# Altium PCB BikeTheftTracker.PcbDoc
Units mil, origin at the board's own origin, x right, y up, seen from the top; angles counter-clockwise.
Board outline 6000 x 4000 mil, 2 copper layers (Top Layer, Bottom Layer); 31 components, 38 nets, 150 pads, 0 vias.
Unrouted connection lines stored in the file: 86.
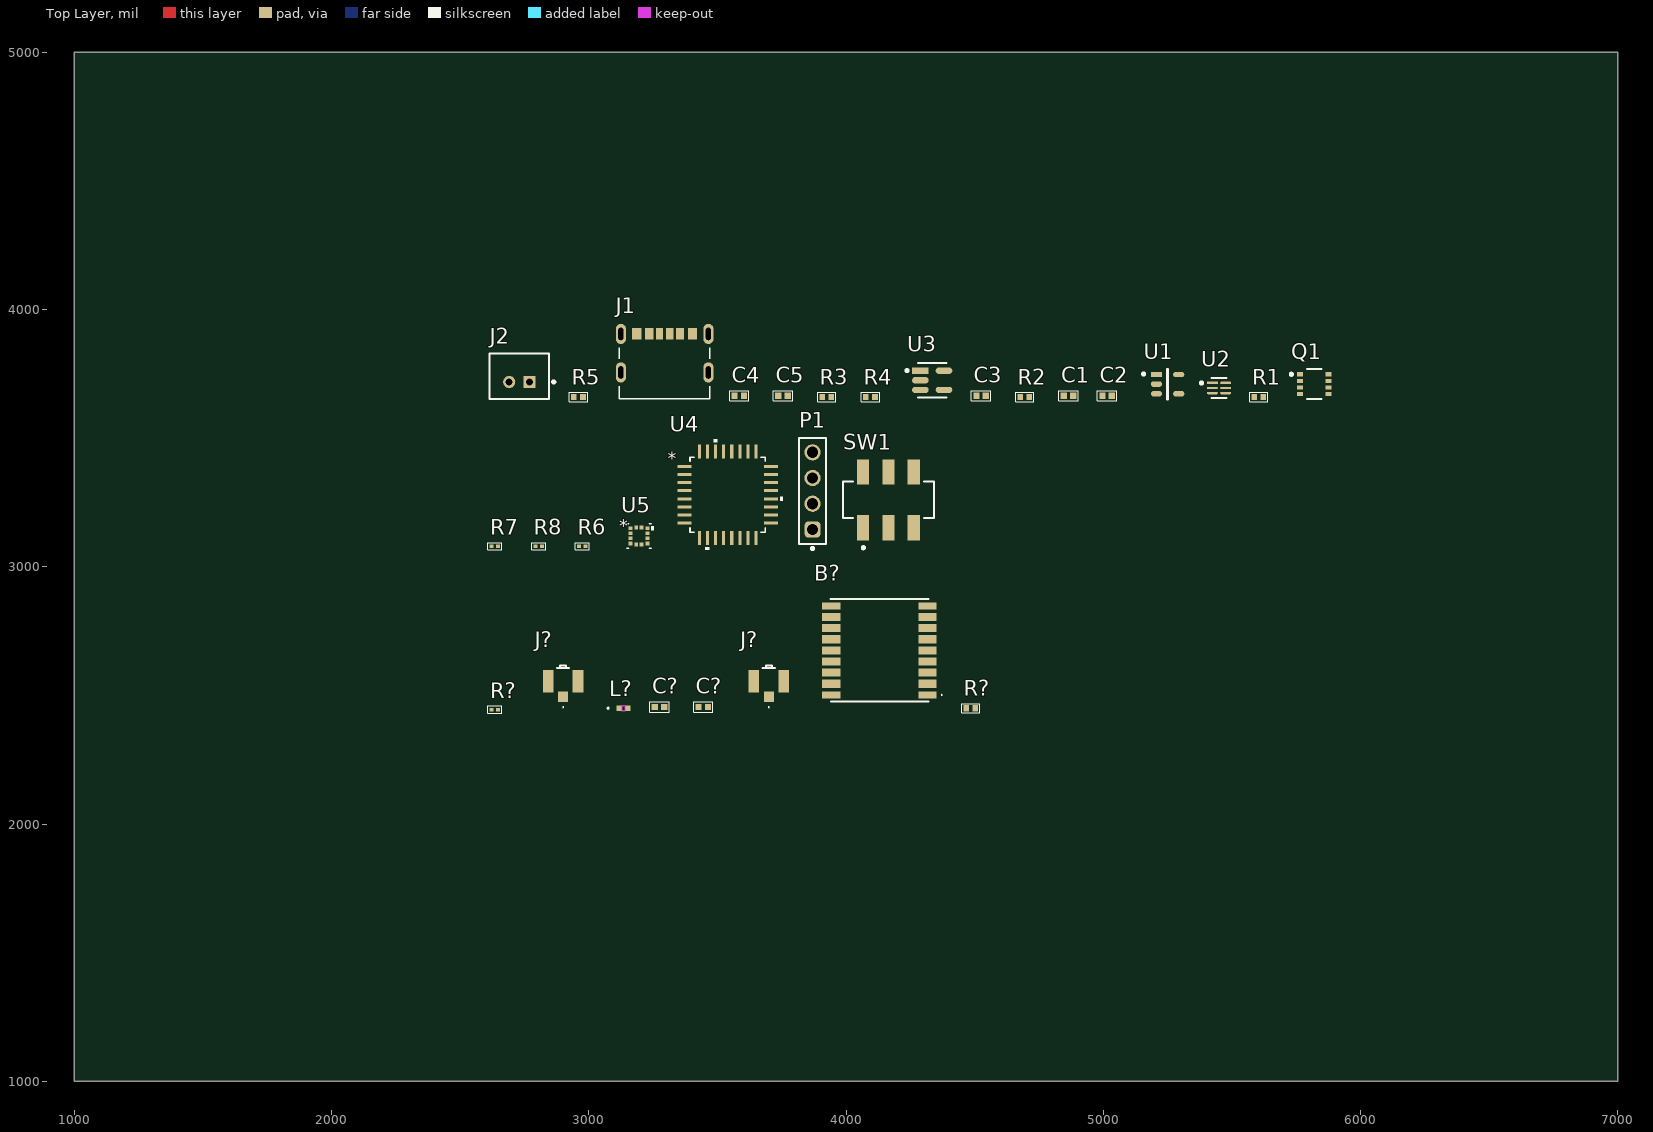
[diagram p0: Top Layer view]
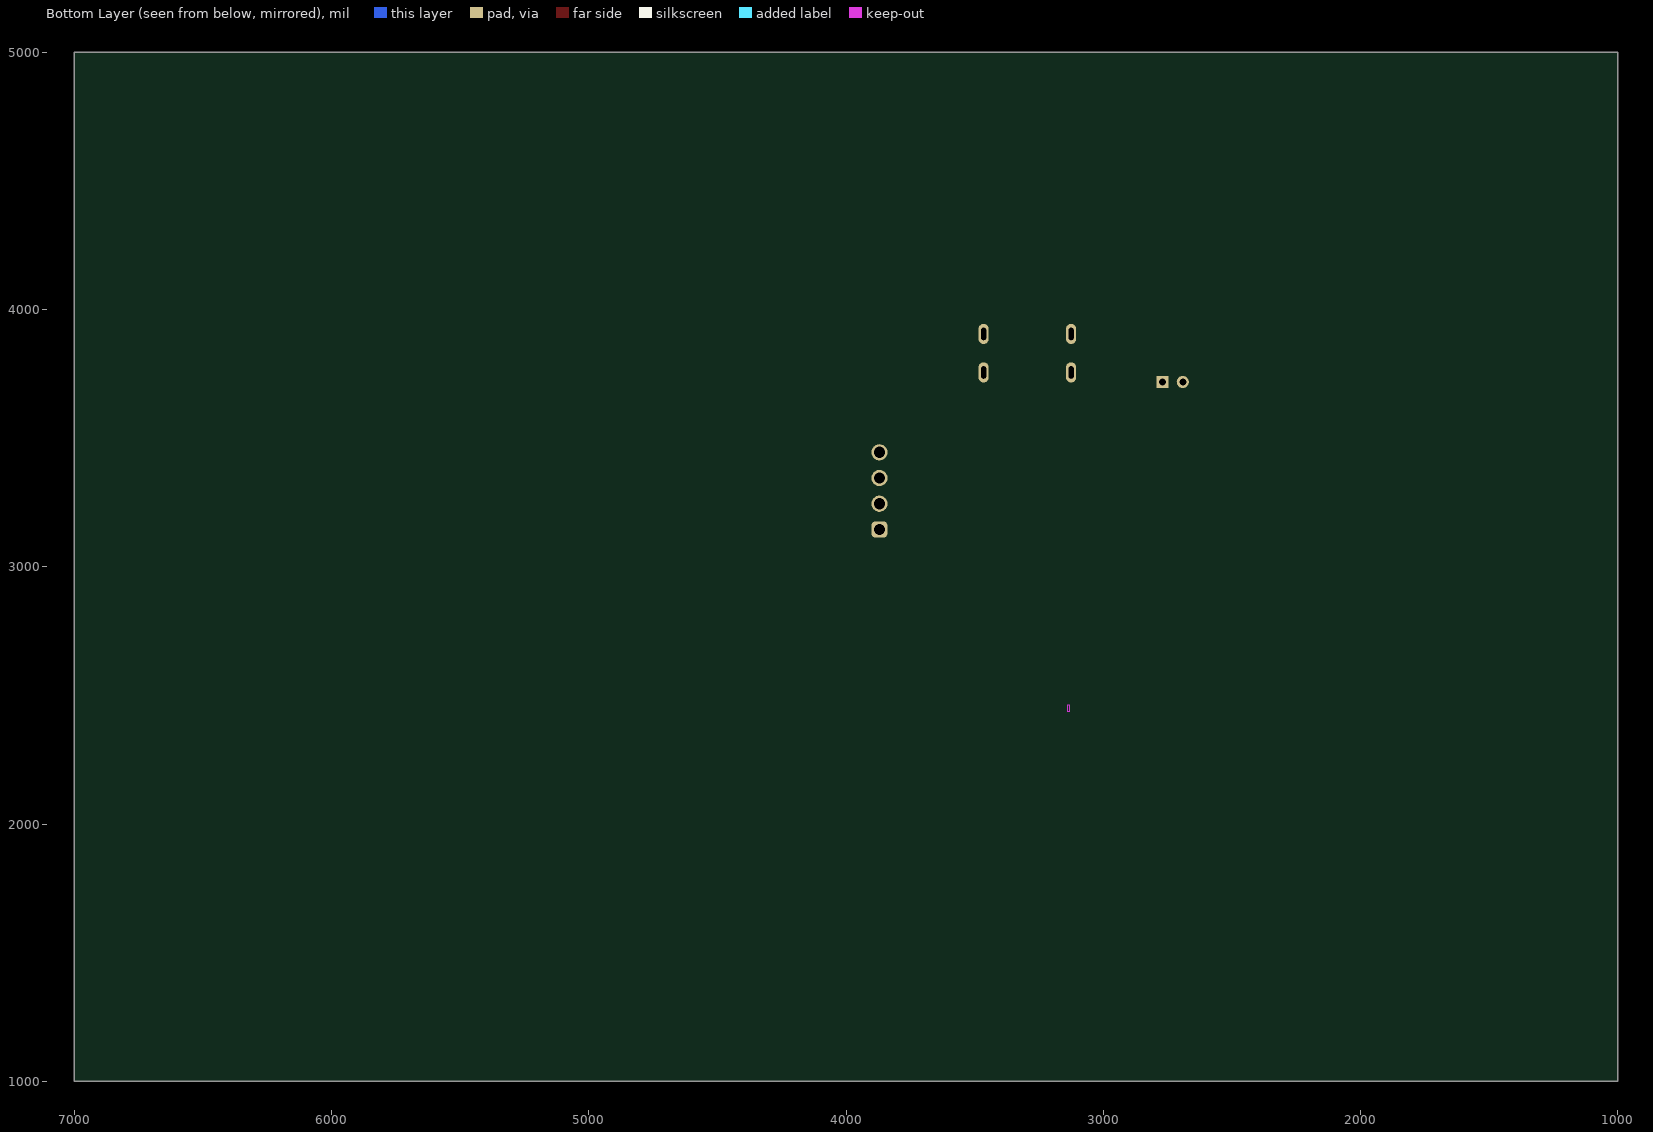
[diagram p1: Bottom Layer view, seen from below]

## Layer stack, top to bottom
Top Solder: solder mask 0.4, Solder Resist, Dk 3.5
Top Layer: signal copper 1.4
Dielectric 1: dielectric 12.6, FR-4, Dk 4.8
Bottom Layer: signal copper 1.4
Bottom Solder: solder mask 0.4, Solder Resist, Dk 3.5

## Board outline
1000,1000 7000,1000 7000,5000 1000,5000

## Design rules (kind name [scope] priority, off if disabled: settings)
Clearance [All] p1: gap=10 ignorepadtopadclearanceinfootprint=FALSE
PolygonConnect [All] p1: connectstyle=Relief reliefconductorwidth=10 reliefentries=4 polygonreliefangle="90 Angle" airgapwidth=10
RoutingVias [All] p1: holewidth=28 width=50 viastyle="Through Hole" minholewidth=28 minwidth=50 maxholewidth=28 maxwidth=50
SolderMaskExpansion [All] p1: expansion=0 istentingtop=FALSE
SupplyNets "Schematic Supply Nets" [InNet('GND')] p1: voltage=0.000
Width [All] p1: maxlimit=10 minlimit=10 preferedwidth=10
30 further rules are at their usual default settings.

## Classes and differential pairs
net class RF: RF_GPS RF_LORAWAN
component class "Power Subsystem": C1 C2 C3 C4 C5 J1 J2 Q1 R1 R2 R3 R4 R5 U1 U2 U3
component class MCU: P1 R6 R7 R8 SW1 U4 U5
component class GPS_LoraWAN: B? C? J? L? R? U?*

## Components (designator, comment, footprint, x,y, rotation, side; value= is the part's Value field where it differs from the comment)
B? "MAX-M10M-00B" MAXM10M00B 4130,2675 r0 top
C1 "1 uF" CAP_0402 4865,3665 r0 top
C2 "1 uF" CAP_0402 5015,3665 r0 top
C3 "0.1 uF" CAP_0402 4525,3665 r0 top
C4 "4.7 uF" CAP_0402 3585,3665 r0 top
C5 "4.7 uF" CAP_0402 3755,3665 r0 top
C? "100 nF" CAP_0402 3445,2455 r0 top
C? "1 uF" CAP_0402 3275,2455 r0 top
J1 "UJC-HP-3-SMT-TR" CUI_UJC-HP-3-SMT-TR 3295,3905 r0 top
J2 "B2B-PH-K(LF)(SN)" FP-B2B-PH-K_LF_SN-MFG 2730,3740 r0 top
J? "U.FL-R-SMT_10_" UFLRSMT10 2900,2555 r0 top
J? "U.FL-R-SMT_10_" UFLRSMT10 3700,2555 r0 top
L? "27 nH" IND_LQG15HN_02_MUR-L 3135,2450 r0 top
P1 "61300411121" 61300411121 3870,3295 r90 top
Q1 "ECH8695R-TL-W" FP-318BF-MFG 5820,3710 r0 top
R1 "330 Ω" RES_0402 5605,3660 r0 top
R2 "2.2 kΩ" RES_0402 4695,3660 r0 top
R3 "5.1 kΩ" RES_0402 3925,3660 r0 top
R4 "5.1 kΩ" RES_0402 4095,3660 r0 top
R5 "2 kΩ" RES_0402 2960,3660 r0 top
R6 "10 kΩ" RES_0201 2975,3080 r0 top
R7 "10 kΩ" RES_0201 2635,3080 r0 top
R8 "10 kΩ" RES_0201 2805,3080 r0 top
R? "10 kΩ" RES_0201 2635,2445 r0 top
R? "10 kΩ" RES_0402 4485,2450 r0 top
SW1 "JS202011SCQN" FP-JS202011SCQN-MFG 4165,3260 r0 top
U1 "AP2112K-3.3TRG1" FP-SOT25-IPC_C 5250,3710 r0 top
U2 "BQ29701DSER" FP-DSE0006A-IPC_A 5450,3695 r0 top
U3 "MCP73831T-2ACI/OT" FP-C04-091-OT-IPC_A 4335,3725 r0 top
U4 "STM32L011K4T6" LQFP32_7X7X1P4 3540,3280 r0 top
U5 "LIS2DW12TR" LGA-12_2X2X0P7_STM 3195,3120 r0 top

## Footprints (in the part's own frame and the unit in brackets; to place one, negate y for a bottom-side part, rotate by r counter-clockwise, add the part's x,y. Pads: shape width x height; smd on the part's side, far side on the other; paste and mask are expansions set on the pad)
61300411121 [mm] "Pin Header, pitch 2.54 mm, THT, Vertical, single row, 4p"
  rrect50% 1.6x1.6 hole 1.1: 1(-3.81,0)
  round 1.6 hole 1.1: 2(-1.27,0) 3(1.27,0) 4(3.81,0)
  silkscreen extent -5.8,-1.35 5.23,1.35, body extent -5.08,-1.27 5.08,1.27, height 8.57
CAP_0402 [mm]
  rect 0.62x0.62 smd mask+0.05: 1(-0.46,0) 2(0.46,0)
  silkscreen extent -0.95,-0.5 0.95,0.5, body extent -0.53,-0.28 0.53,0.28, height 0.55
CUI_UJC-HP-3-SMT-TR [mm]
  rect 0.7x1.15 smd: A5(-0.5,0.005) B5(0.5,0.005)
  rect 0.8x1.15 smd: A9(1.52,0.005) B9(-1.52,0.005)
  rect 0.9x1.15 smd: A12(2.75,0.005) B12(-2.75,0.005)
  oval 1x2 hole 0.5 slot 1.2 at 90 deg: S1(-4.32,0) S2(4.32,0) S3(-4.32,-3.8) S4(4.32,-3.8)
  silkscreen extent -4.47,-6.4 4.47,-1.35, body extent -4.47,-6.44 4.47,0.46, height 3.3
FP-318BF-MFG [mm]
  rect 0.6x0.4 smd paste+0 mask+0: 1(-1.4,0.975) 2(-1.4,0.325) 3(-1.4,-0.325) 4(-1.4,-0.975) 5(1.4,-0.975) 6(1.4,-0.325) 7(1.4,0.325) 8(1.4,0.975)
  silkscreen extent -2.38,-1.48 0.72,1.48, body extent -1.8,-1.58 1.8,1.58, height 0.25
FP-B2B-PH-K_LF_SN-MFG [mm]
  rect 1.2x1.2 hole 0.7 paste-2539.97 mask+0: 1(1,-0.55)
  round 1.2 hole 0.7 paste-2539.97 mask+0: 2(-1,-0.55)
  silkscreen extent -2.95,-2.25 3.53,2.25, body extent -3.05,-2.35 3.05,2.35, height 0.25
FP-C04-091-OT-IPC_A [mil]
  rect 64.5x24.33 smd paste+0 mask+0: 1(-45.91,37.4)
  rrect100% 64.5x24.33 smd paste+0 mask+0: 2(-45.91,0) 3(-45.91,-37.4) 4(45.91,-37.4) 5(45.91,37.4)
  silkscreen extent -103,-67 55,67
FP-DSE0006A-IPC_A [mm]
  rect 1.065x0.242 smd paste+0 mask+0: 1(-0.654,0.5)
  rrect100% 1.065x0.242 smd paste+0 mask+0: 2(-0.654,0) 3(-0.654,-0.5) 4(0.654,-0.5) 5(0.654,0) 6(0.654,0.5)
  silkscreen extent -1.86,-1 0.75,1, body extent -1.69,-1.25 1.69,1.25, height 0.25
FP-JS202011SCQN-MFG [mm]
  rect 1.2x2.5 smd paste+0 mask+0: 1(-2.5,-2.75) 2(0,-2.75) 3(2.5,-2.75) 4(-2.5,2.75) 5(0,2.75) 6(2.5,2.75)
  silkscreen extent -4.5,-4.85 4.5,1.8, body extent -4.6,-4.1 4.6,4.1, height 0.25
FP-SOT25-IPC_C [mm]
  rect 1.107x0.536 smd paste+0 mask+0: 1(-1.101,0.95)
  rrect100% 1.107x0.536 smd paste+0 mask+0: 2(-1.101,0) 3(-1.101,-0.95) 4(1.101,-0.95) 5(1.101,0.95)
  silkscreen extent -2.48,-1.5 0.05,1.5, body extent -1.75,-1.6 1.75,1.6, height 0.25
IND_LQG15HN_02_MUR-L [mil]
  rect 20x20 smd paste+0 mask+0: 1(-16.5,0) 2(16.5,0)
  Top Layer keep-out region: -4.5,-9 -4.5,9 4.5,9 4.5,-9
  Keep-Out Layer region: -4.5,-11 -4.5,11 4.5,11 4.5,-11
  silkscreen extent -62,-3 -56,3, body extent -21,-11 21,11, height 20
LGA-12_2X2X0P7_STM [mil]
  rect 15x14 smd paste+0 mask+4: 1(-33,29.53) 2(-33,9.84) 3(-33,-9.84) 4(-33,-29.53) 7(33,-29.53) 8(33,-9.84) 9(33,9.84) 10(33,29.53)
  rect 14x15 smd paste+0 mask+4: 5(-9.84,-33) 6(9.84,-33) 11(9.84,33) 12(-9.84,33)
  silkscreen extent -48,-48 58,48, body extent -43,-43 43,43, height 28
LQFP32_7X7X1P4 [mm]
  rect 1.353x0.304 smd paste+0 mask+0: 1(-4.271,2.8) 2(-4.271,2) 3(-4.271,1.2) 4(-4.271,0.4) 5(-4.271,-0.4) 6(-4.271,-1.2) 7(-4.271,-2) 8(-4.271,-2.8) 17(4.271,-2.8) 18(4.271,-2) 19(4.271,-1.2) 20(4.271,-0.4) 21(4.271,0.4) 22(4.271,1.2) 23(4.271,2) 24(4.271,2.8)
  rect 0.304x1.353 smd paste+0 mask+0: 9(-2.8,-4.271) 10(-2,-4.271) 11(-1.2,-4.271) 12(-0.4,-4.271) 13(0.4,-4.271) 14(1.2,-4.271) 15(2,-4.271) 16(2.8,-4.271) 25(2.8,4.271) 26(2,4.271) 27(1.2,4.271) 28(0.4,4.271) 29(-0.4,4.271) 30(-1.2,4.271) 31(-2,4.271) 32(-2.8,4.271)
  silkscreen extent -3.72,-5.46 5.46,5.46, body extent -4.6,-4.6 4.6,4.6, height 1.6
MAXM10M00B [mm]
  rect 1.8x0.7 smd: 1(4.75,-4.4) 9(4.75,4.4) 10(-4.75,4.4) 18(-4.75,-4.4)
  rect 1.8x0.8 smd: 2(4.75,-3.3) 3(4.75,-2.2) 4(4.75,-1.1) 5(4.75,0) 6(4.75,1.1) 7(4.75,2.2) 8(4.75,3.3) 11(-4.75,3.3) 12(-4.75,2.2) 13(-4.75,1.1) 14(-4.75,0) 15(-4.75,-1.1) 16(-4.75,-2.2) 17(-4.75,-3.3)
  silkscreen extent -4.85,-5.05 6.2,5.05, body extent -4.85,-5.05 4.85,5.05, height 2.5
RES_0201 [mm]
  rect 0.4x0.35 smd mask+0.05: 1(-0.325,0) 2(0.325,0)
  silkscreen extent -0.7,-0.35 0.7,0.35, body extent -0.32,-0.17 0.32,0.17, height 0.26
RES_0402 [mm]
  rect 0.55x0.6 smd mask+0.05: 1(-0.45,0) 2(0.45,0)
  silkscreen extent -0.9,-0.45 0.9,0.45, body extent -0.53,-0.28 0.53,0.28, height 0.4
UFLRSMT10 [mm]
  rect 1x1.05 smd: 1(0,-1.525)
  rect 1.05x2.2 smd: 2(-1.475,0) 3(1.475,0)
  silkscreen extent -0.6,-2.6 0.6,1.55, body extent -1.5,-1.55 1.5,1.55, height 1.25

## Part data
B?: "GPS Modules u-blox M10 GNSS LCC module, firmware in ROM, crystal oscillator", Manufacturer_Name=u-blox, Mouser Part Number=377-MAX-M10M-00B, Arrow Part Number=MAX-M10M-00B, Arrow Price/Stock=https://www.arrow.com/en/products/max-m10m-00b/u-blox?utm_currency=USD&region=nac, Datasheet Link=https://content.u-blox.com/sites/default/files/documents/MAX-M10M_IntegrationManual_UBX-22038241.pdf, Geometry.Height=2.7mm, Manufacturer_Part_Number=MAX-M10M-00B, Mouser Price/Stock=https://www.mouser.co.uk/ProductDetail/u-blox/MAX-M10M-00B?qs=A6eO%252BMLsxmQGh8%2FJ1ZmexA%3D%3D
C1 C2 C3 C4 C5 C? C?: library part CAP_0402, "Capacitor SMD 0402 Generic", Capacitance="100 pF", LCSC Part Number=C106200, Manufacturer=YAGEO, Manufacturer Part Number=CC0402JRNPO9BN101, Tolerance=5%
J1: "USB Connectors USB jack, C type, power only, 6 pin, horizonal, gold flash plating, surface mount, T&R", Manufacturer 1="Same Sky", Package=None, Supplier Part Number 1=490-UJC-HP-3-SMT-TR, Availability=Unavailable, Manufacturer Part Number 1=UJC-HP-3-SMT-TR, MP=UJC-HP-3-SMT-TR, Price=None, Supplier 1=Mouser
J2: library part CMP-17439-000674-1, "Connector Header Through Hole 2 position 0.079\" (2.00mm)", Color=Beige, Current Rating=2A, Insulation Resistance=1GR, Manufacturer 1="JST Commercial", Manufacturer Part Number 1=B2B-PH-K-S(LF)(SN), Max Operating Temperature=85°C, Min Operating Temperature=-25°C, Supplier Part Number 1=306-B2BPHKSLFSNPP, Voltage Rating=100V, Contact Material=Brass, Contact Plating=Tin, Gender=Male, Lead Free="Lead Free", Material=Polyamide, Mount="Through Hole", Number of Positions=2, Number of Rows=1, Pitch=2mm, Supplier 1=Mouser, Termination=Crimp
J? J?: "U.FL (UMCC) Connector Receptacle, Male Pin 50 Ohms Surface Mount Solder", Arrow Part Number=U.FL-R-SMT(10), Manufacturer_Name=Hirose, Mouser Part Number=798-U.FL-R-SMT10, Arrow Price/Stock=https://www.arrow.com/en/products/u.fl-r-smt-10/hirose-electric?utm_currency=USD&region=nac, Datasheet Link=https://eu.mouser.com/datasheet/2/185/hiros05388_1-2269186.pdf, Geometry.Height=1.45mm, Manufacturer_Part_Number=U.FL-R-SMT(10), Mouser Price/Stock=https://www.mouser.co.uk/ProductDetail/Hirose-Connector/U.FL-R-SMT10?qs=Ux3WWAnHpjBT1CWD8UMEMQ%3D%3D
L?: library part LQG15HS15NJ02D, "Description", Manufacturer_Name=Murata, Copyright="Copyright (C) 2025 Ultra Librarian. All rights reserved.", Manufacturer_Part_Number=LQG15HS15NJ02D
P1: library part CMP-1502-01064-4, "THT Vertical Pin Header WR-PHD, Pitch 2.54 mm, Single Row, 4 pins", Color=Black, Contact Resistance=20mΩ, Current Rating=3A, Max Operating Temperature=105°C, Min Operating Temperature=-40°C, Operating Supply Voltage=250V, Connector Type="Male Pin", Contact Material=Gold, Contact Mating Length=5.9944mm, Contact Plating=Gold, Gender=Male, Height=8.89mm, Lead Free="Lead Free", Lead Pitch=2.54mm, Mount="Through Hole", Number of Contacts=4, Number of Pins=4, Number of Positions=4, Number of Rows=1, Orientation=Vertical, Packaging=Bulk, Pitch=2.54mm, RoHS=Compliant, Termination=Solder, Voltage Rating=250V
Q1: library part CMP-00278-51167104-1, "ECH8695R-TL-W Dual N-Channel Power MOSFET, 24V, 11 A, 9.1 mΩ", Case/Package=SMD/SMT, Continuous Drain Current (ID)=11A, Drain to Source Breakdown Voltage=24V, Drain to Source Resistance=7mΩ, Gate to Source Voltage (Vgs)=12.5V, Manufacturer 1=onsemi, Manufacturer Lifecycle Status=ACTIVE, Max Junction Temperature (Tj)=150°C, Max Power Dissipation=1.4W, Min Operating Temperature=-55°C, Power Dissipation=1.5W, Supplier Part Number 1=863-ECH8695R-TL-W, Contact Plating=Tin, Drain to Source Voltage (Vdss)=24V, Element Configuration=Dual, Fall Time=22.3µs, Height=950µm, Lead Free="Lead Free", Length=2.9mm, Lifecycle Status=Production, Manufacturer Part Number 1=ECH8695R-TL-W, Max Operating Temperature=150°C, Mount="Surface Mount", NexarPartId=51167104, Number of Channels=2, Number of Pins=8, Rds On Max=9.1mΩ, Rise Time=320ns, RoHS=Compliant, Schedule B="8541290080, 8541290080|8541290080, 8541290080|8541290080|8541290080, 8541290080|8541290080|8541290080|8541290080", Supplier 1=Mouser, Turn-Off Delay Time=19.7µs, Turn-On Delay Time=300ns, Width=2.3mm
R1 R2 R3 R4 R5 R?: library part RES_0402, "Resistor SMD 0402 Generic", LCSC Part Number=C93947, Manufacturer=YAGEO, Manufacturer Part Number=RC0402FR07150KL, Resistance="150 kOhm", Tolerance=1%
R6 R7 R8 R?: library part RES_0201, "Resistor SMD 0201 Generic", LCSC Part Number=C852221, Manufacturer=YAGEO, Manufacturer Part Number=RT0201BRD07200RL, Resistance="200 Ohm", Tolerance=0.1%
SW1: library part CMP-2000-05087-3, "SWITCH SLIDE DPDT 300MA 6V", Actuator Color=Black, Contact Current Rating=300mA, Contact Resistance=70mR, Flammability Rating="UL94 V-2", Max Operating Temperature=85°C, Max Voltage Rating (DC)=6V, Min Operating Temperature=-20°C, Package Quantity=1, Actuator Length=2mm, Actuator Material=Nylon, Actuator Type=Standard, Contact Material="Copper Alloy", Contact Plating=Silver, Current Rating=300mA, Depth=7.5mm, Electrical Life=5000Cycles, Housing Material=Nylon, Lead Free="Lead Free", Length=9mm, Max Current Rating=300mA, Mount="Surface Mount", Orientation=Vertical, Packaging="Tape and Reel", Radiation Hardening=No, REACH SVHC="No SVHC", Series=JS, Switch Function=On-On, Switch Travel=2mm, Termination="Gull Wing", Throw Configuration=DPDT, Voltage Rating (DC)=6V
U1: library part CMP-12756-000035-1, "IC REG LINEAR 3.3V 600MA SOT25", Case/Package=SOT-23-5, Dropout Voltage=250mV, Manufacturer 1="Diodes Incorporated", Max Input Voltage=6V, Max Operating Temperature=85°C, Max Output Current=600mA, Min Input Voltage=2.5V, Min Operating Temperature=-40°C, Output Voltage=3.3V, Package Quantity=1, Quiescent Current=55uA, Supplier Part Number 1=621-AP2112K-3.3TRG1, Accuracy=1.5%, Height=1.3mm, Lead Free="Lead Free", Length=3.1mm, Manufacturer Part Number 1=AP2112K-3.3TRG1, Mount="Surface Mount", Number of Outputs=1, Number of Pins=5, Number of Regulators=1, Output Current=600mA, Output Type=Fixed, Packaging="Tape and Reel", Polarity=Positive, Supplier 1=Mouser, Supplier Unit Price 1=3.66, Width=1.7mm
U2: library part CMP-04911-000034-1, "IC LITHIUM BATT PROTECT 6-SON", Case/Package=WFDFN, Manufacturer 1="Texas Instruments", Max Operating Temperature=85°C, Min Operating Temperature=-40°C, Operating Supply Voltage=28V, Supplier Part Number 1=595-BQ29701DSER, Contact Plating=Gold, Fault Protection="Over Current", Lead Free="Lead Free", Manufacturer Part Number 1=BQ29701DSER, Mount="Surface Mount", Number of Cells=1, Number of Pins=6, Packaging="Tape and Reel", RoHS Compliant=Yes, Supplier 1=Mouser
U3: library part CMP-0133-00143-2, "IC CONTROLLR LI-ION 4.2V SOT23-5", Case/Package=SOT-23, Drain to Source Resistance=350mR, Manufacturer 1="Microchip Technology", Max Charge Current=500mA, Max Input Voltage=6V, Max Operating Temperature=85°C, Max Output Voltage=4.5V, Max Power Dissipation=1.54W, Min Operating Temperature=-40°C, Min Output Voltage=4.168V, Min Supply Voltage=3.75V, Output Voltage=4.2V, Supplier Part Number 1=579-MCP73831T-2ACIOT, Voltage Rating=4.534V, Contact Plating=Tin, Height=0.051inch, Lead Free="Lead Free", Length=0.122inch, Manufacturer Part Number 1=MCP73831T-2ACI/OT, Max Supply Voltage=6V, Mount="Surface Mount", Number of Cells=1, Number of Channels=1, Number of Outputs=1, Number of Pins=5, Output Current=500mA, Packaging="Tape and Reel", Radiation Hardening=No, REACH SVHC="No SVHC", Supplier 1=Mouser, Termination=SMD/SMT, Weight=0.00709oz, Width=0.071inch
U4: "Ultra-low-power Arm Cortex-M0+ MCU with 16-Kbytes of Flash memory, 32 MHz CPU", Manufacturer_Name=STMicroelectronics, Copyright="Copyright (C) 2026 Ultra Librarian. All rights reserved.", Datasheet=https://www.st.com/resource/en/datasheet/stm32l011d4.pdf, Manufacturer_Part_Number=STM32L011K4T6, RefDes=RefDes, Type=Type
U5: "MEMS digital output motion sensor: high-performance ultralow-power 3-axis &#34;femto&#34; accelerometer", Manufacturer_Name=STMicroelectronics, Copyright="Copyright (C) 2026 Ultra Librarian. All rights reserved.", Manufacturer_Part_Number=LIS2DW12TR, RefDes=RefDes, Type=Type

## Nets (pads, with @x,y where several pads share a name; then routed paths per layer and width w, separated by ;. In a path a pad name is that pad's centre, name@x,y a point inside that pad or via, vN(x,y) a via of type N, cw(c..) or ccw(c..) an arc to the next point about the centre after c; other vN are vias at no path point)
3V3: B?.7 B?.8 C2.2 C?.2 P1.3 R6.1 R7.2 R8.2 R?.2@4502.72,2450 SW1.1 U1.5 U4.1 U4.5 U4.17 U5.2 U5.9 U5.10
BAT_NEG: C3.1 J2.2 Q1.1 U2.4
BAT_RAW: C1.2 C5.2 J2.1 R1.1 U1.1 U1.3 U3.3
BAT_SENSE: C3.2 R1.2 U2.5
COUT_CTRL: Q1.4 U2.2
DOUT_CTRL: Q1.2 U2.3
EINT: B?.5
GND: B?.1 B?.10 B?.12 C1.1 C2.1 C4.1 C5.1 C?.1 J1.A12 J1.B12 J1.S1 J1.S2 J1.S3 J1.S4 J?.2 J?.3 P1.4 R3.1 R4.2 R5.1 R?.2@2647.8,2445 SW1.3 U1.2 U3.2 U4.16 U4.32 U5.3 U5.6 U5.7 U5.8
INT_ACC: U5.11
NetJ1_A5: J1.A5 R4.1
NetJ1_B5: J1.B5 R3.2
NetR2_2: R2.2 U2.6
NetR5_2: R5.2 U3.5
NetR6_2: R6.2 U4.4
NetR?_1: R?.1@2622.2,2445
PACK_NEG: Q1.3 R2.1
PPS: B?.4
RF_GPS: B?.11 J?.1@3700,2494.96 L?.1
RF_LORAWAN: J?.1@2900,2494.96
RST: B?.9 R?.1@4467.28,2450
RST_LORA: U4.10
RX_GPS: B?.3 U4.8
RX_LORAWAN: U4.21
SAFE: B?.18
SCL: R8.1 U4.19 U5.1
SDA: R7.1 U4.20
SDI: U5.4
SLIDE: SW1.2 U4.7
SWCLK: P1.2 U4.24
SWD_CLK: 
SWD_DATA: 
SWDIO: P1.1 U4.23
TX_GPS: B?.2 U4.9
TX_LORAWAN: U4.22
USB_5V: C4.2 J1.A9 J1.B9 U3.4
VBAT: B?.6
VCC_RF: B?.14 L?.2
VMID: Q1.5 Q1.6 Q1.7 Q1.8
pads on no net: B?.13 B?.15 B?.16 B?.17 SW1.4 SW1.5 SW1.6 U1.4 U2.1 U3.1 U4.2 U4.3 U4.6 U4.11 U4.12 U4.13 U4.14 U4.15 U4.18 U4.25 U4.26 U4.27 U4.28 U4.29 U4.30 U4.31 U5.5 U5.12

## Text inside footprints (layer, text, board x,y; h text height)
U4: Top Overlay "*" at 3307.72,3395.98 h50; Mechanical 13 "*" at 3401,3380.98 h50
U5: Top Overlay "*" at 3119,3134.37 h50; Mechanical 13 "*" at 3155,3134.37 h50